# EAGLE board board 100% avec isolation Groupe 4 (EAGLE 8.3.1)
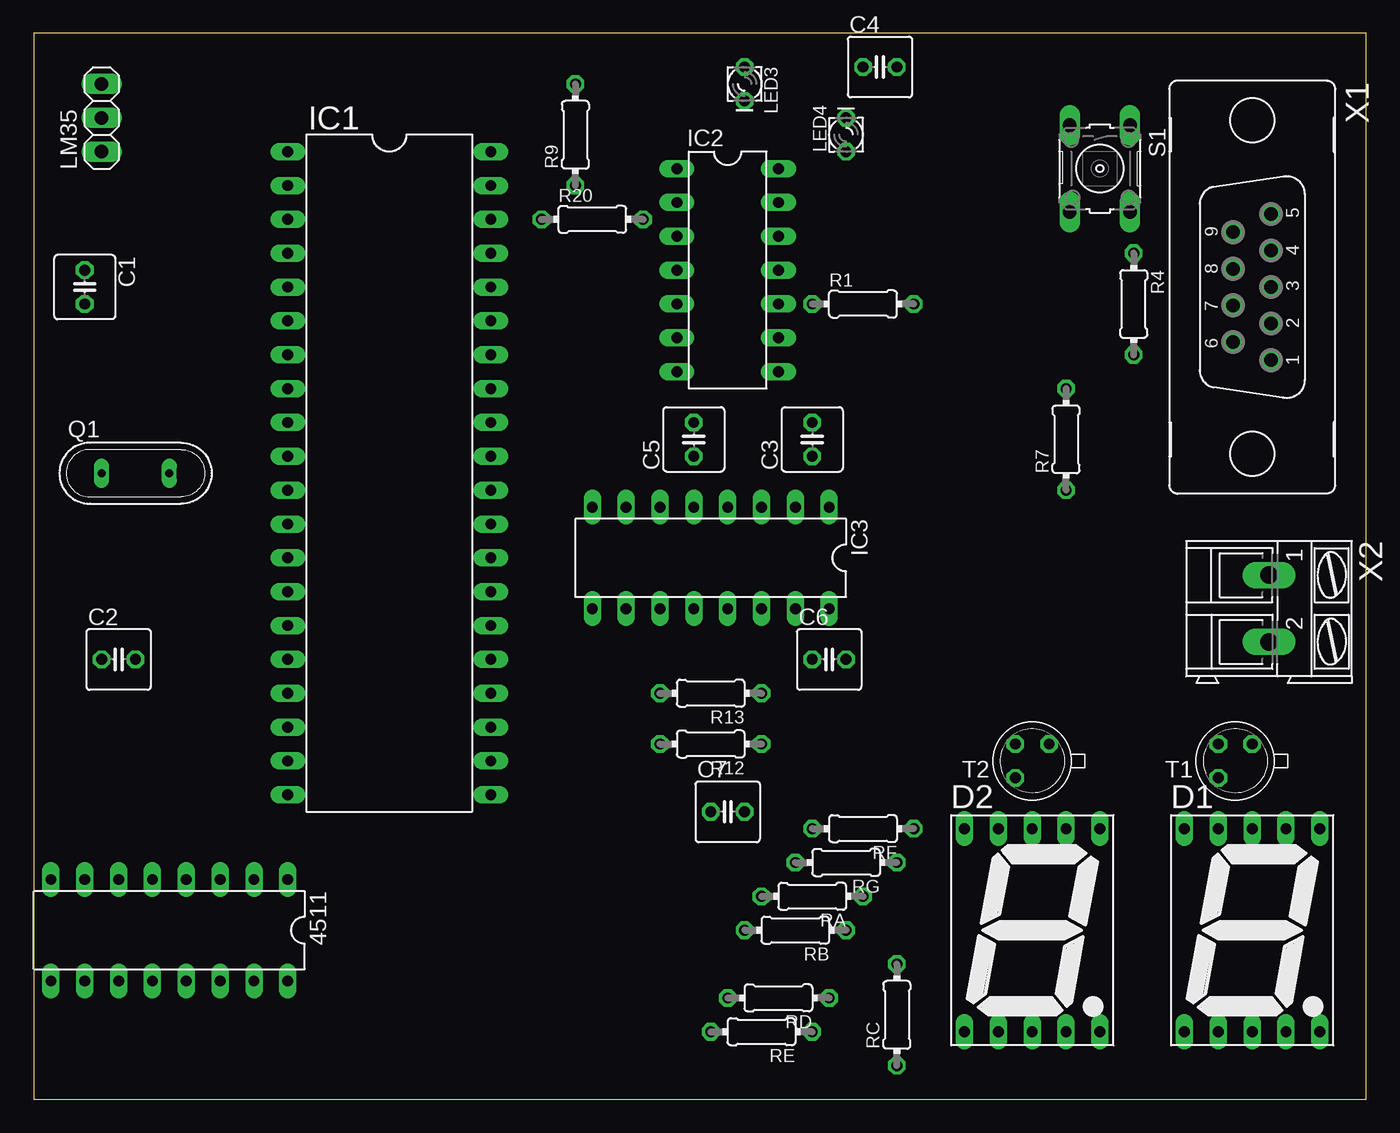
[diagram p0: board, top side]
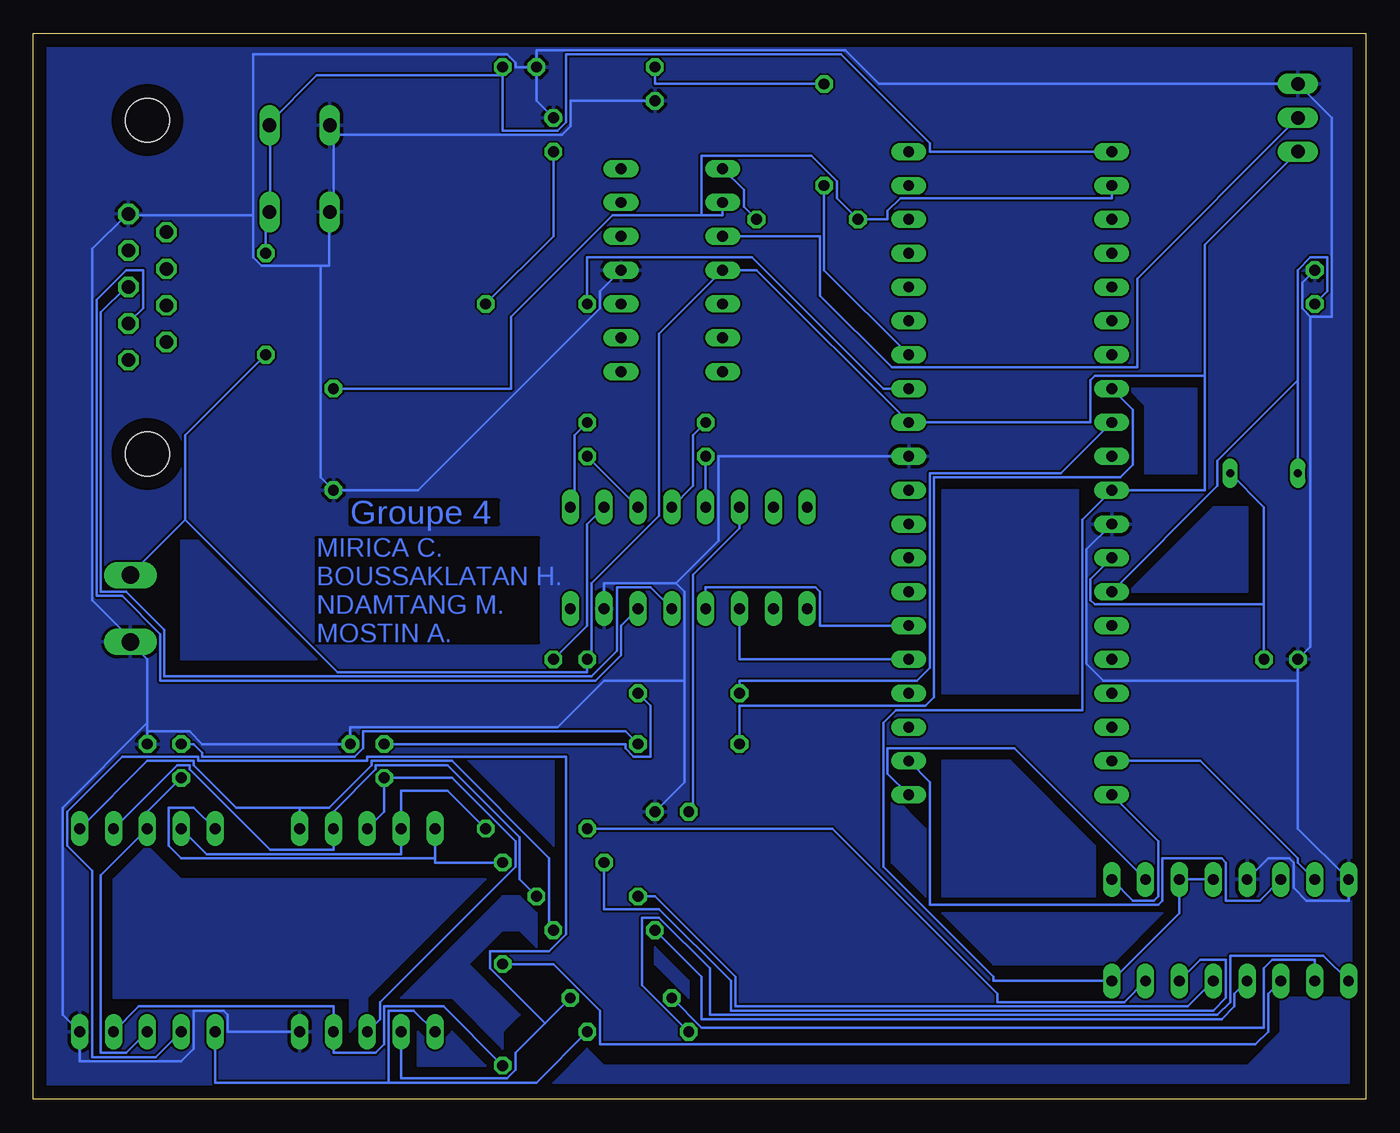
[diagram p1: board, bottom side, seen from below]

Size 100 x 80 mm. Coordinates in mm from the lower left corner, seen from the top.
Outline: 0,0 100,0 100,80 0,80 0,0
Copper layers (1*16): Top 0.035mm / dielectric 1.5mm / Bottom 0.035mm
Design rules "default": minimum track width 6mil, minimum drill 0.35mm, track to track 6mil, track to pad 6mil, pad to pad 6mil, via to via 6mil, smd to smd 6mil, copper to edge 40mil, drill to drill 6mil, minimum pad ring 10mil, minimum via ring 8mil, stop-mask expansion 4mil, vias tented up to drill 0mil, thermal gap 10mil

## Footprints (pad centres in the part's own frame; a part is rotated, then mirrored left to right if it is on the bottom)
DIL16 = drill 0.813 long: 1 -8.89,-3.81; 2 -6.35,-3.81; 3 -3.81,-3.81; 4 -1.27,-3.81; 5 1.27,-3.81; 6 3.81,-3.81; 7 6.35,-3.81; 8 8.89,-3.81; 9 8.89,3.81; 10 6.35,3.81; 11 3.81,3.81; 12 1.27,3.81; 13 -1.27,3.81; 14 -3.81,3.81; 15 -6.35,3.81; 16 -8.89,3.81
C025-050X050 = drill 0.813 octagon: 1 -1.27,0; 2 1.27,0
7SEG-13 = drill 0.813 long: 1 -5.08,-7.62; 2 -2.54,-7.62; 3 0,-7.62; 4 2.54,-7.62; 5 5.08,-7.62; 6 5.08,7.62; 7 2.54,7.62; 8 0,7.62; 9 -2.54,7.62; 10 -5.08,7.62
DIL40 = drill 0.813 long: 1 -24.13,-7.62; 2 -21.59,-7.62; 3 -19.05,-7.62; 4 -16.51,-7.62; 5 -13.97,-7.62; 6 -11.43,-7.62; 7 -8.89,-7.62; 8 -6.35,-7.62; 9 -3.81,-7.62; 10 -1.27,-7.62; 11 1.27,-7.62; 12 3.81,-7.62; 13 6.35,-7.62; 14 8.89,-7.62; 15 11.43,-7.62; 16 13.97,-7.62; 17 16.51,-7.62; 18 19.05,-7.62; 19 21.59,-7.62; 20 24.13,-7.62; 21 24.13,7.62; 22 21.59,7.62; 23 19.05,7.62; 24 16.51,7.62; 25 13.97,7.62; 26 11.43,7.62; 27 8.89,7.62; 28 6.35,7.62; 29 3.81,7.62; 30 1.27,7.62; 31 -1.27,7.62; 32 -3.81,7.62; 33 -6.35,7.62; 34 -8.89,7.62; 35 -11.43,7.62; 36 -13.97,7.62; 37 -16.51,7.62; 38 -19.05,7.62; 39 -21.59,7.62; 40 -24.13,7.62
DIL14 = drill 0.813 long: 1 -7.62,-3.81; 2 -5.08,-3.81; 3 -2.54,-3.81; 4 0,-3.81; 5 2.54,-3.81; 6 5.08,-3.81; 7 7.62,-3.81; 8 7.62,3.81; 9 5.08,3.81; 10 2.54,3.81; 11 0,3.81; 12 -2.54,3.81; 13 -5.08,3.81; 14 -7.62,3.81
LED_LD260 = drill 0.813 octagon: A -1.27,0; K 1.27,0
1X03 = drill 1.016 long: 1 -2.54,0; 2 0,0; 3 2.54,0
QS = drill 0.61 long: 1 -2.54,0; 2 2.54,0
0204/7 = drill 0.813 octagon: 1 -3.81,0; 2 3.81,0
B3F-10XX = drill 1.016 long: 1 -3.251,2.261; 2 3.251,2.261; 3 -3.251,-2.261; 4 3.251,-2.261
TO18 = drill 0.813 octagon: 1 -1.27,-1.27; 2 1.27,-1.27; 3 1.27,1.27
F09V = drill 1.016 octagon: 1 5.486,1.422; 2 2.743,1.422; 3 0,1.422; 4 -2.743,1.422; 5 -5.486,1.422; 6 4.115,-1.422; 7 1.372,-1.422; 8 -1.372,-1.422; 9 -4.115,-1.422 | hole 3.302: -12.522,0; 12.522,0
AK300/2 = drill 1.321 long: 1 -2.515,0; 2 2.489,0

## Placement (x,y rotation side)
4511  [DIL16]  10.16,12.7 180 top
C1  [C025-050X050]  3.81,60.96 270 top
C2  [C025-050X050]  6.35,33.02 0 top
C3  [C025-050X050]  58.42,49.53 90 top
C4  [C025-050X050]  63.5,77.47 0 top
C5  [C025-050X050]  49.53,49.53 90 top
C6  [C025-050X050]  59.69,33.02 0 top
C7  [C025-050X050]  52.07,21.59 0 top
D1  [7SEG-13]  91.44,12.7 0 top
D2  [7SEG-13]  74.93,12.7 0 top
IC1  PIC16F877P  [DIL40]  26.67,46.99 270 top
IC2  [DIL14]  52.07,62.23 270 top
IC3  MAX232  [DIL16]  50.8,40.64 180 top
LED3  [LED_LD260]  53.34,76.2 270 top
LED4  [LED_LD260]  60.96,72.39 90 top
LM35  [1X03]  5.08,73.66 90 top
Q1  [QS]  7.62,46.99 0 top
R1  [0204/7]  62.23,59.69 0 top
R4  [0204/7]  82.55,59.69 270 top
R7  [0204/7]  77.47,49.53 90 top
R9  [0204/7]  40.64,72.39 90 top
R12  [0204/7]  50.8,26.67 180 top
R13  [0204/7]  50.8,30.48 180 top
R20  [0204/7]  41.91,66.04 0 top
RA  [0204/7]  58.42,15.24 180 top
RB  [0204/7]  57.15,12.7 180 top
RC  [0204/7]  64.77,6.35 90 top
RD  [0204/7]  55.88,7.62 180 top
RE  [0204/7]  54.61,5.08 180 top
RF  [0204/7]  62.23,20.32 180 top
RG  [0204/7]  60.96,17.78 180 top
S1  [B3F-10XX]  80.01,69.85 270 top
T1  2N2222  [TO18]  90.17,25.4 180 top
T2  2N2222  [TO18]  74.93,25.4 180 top
X1  [F09V]  91.44,60.96 270 top
X2  [AK300/2]  92.71,36.83 270 top

## Library data of the parts
4511 IC2 = ic-package
C1-C7 R1 R4 R7 R9 R12 R13 R20 RA RB RC RD RE RF RG = rcl
D1 D2 Q1 = special
IC1 = microchip; MF: MICROCHIP; MPN: PIC16F877-04/P; OC_FARNELL: 9761349; OC_NEWARK: 61K3463
IC3 = maxim; MF: MAXIM; MPN: MAX232ACPE+; OC_FARNELL: 9723773; OC_NEWARK: 68K4544
LED3 LED4 = eagle-ltspice; SPICEMODEL: NONE; SPICEPREFIX: D; SPICETYPE: diode
LM35 = pinhead
S1 = switch-omron; MPN: B3F-1000; OC_FARNELL: 176432; OC_NEWARK: 36M3542
T1 T2 = transistor
X1 = con-subd; OC_FARNELL: unknown; OC_NEWARK: unknown
X2 = con-ptr500; OC_FARNELL: unknown; OC_NEWARK: unknown

## Nets
GND: 4511.5 4511.8 C1.1 C2.1 C4.1 C7.2 D1.5 D2.5 IC1.12 IC1.31 IC2.11 IC3.15 LED3.K LED4.K LM35.3 R7.1 S1.3 S1.4 T1.1 T2.1 X1.5 X2.2
N$1: IC1.9 R13.2
N$2: C1.2 IC1.14 Q1.1
N$3: C3.2 IC3.1
N$4: IC1.2 IC2.2 R7.2 R20.1
N$5: IC2.3 LM35.2
N$6: LED4.A R1.2
N$7: C4.2 IC1.1 R4.1 S1.1 S1.2
N$8: C2.2 IC1.13 Q1.2
N$9: 4511.1 IC1.20
N$10: LED3.A R9.2
N$11: IC1.34 R9.1
N$12: IC1.33 R1.1
N$13: IC2.1 R20.2
N$14: 4511.2 IC1.21
N$15: IC3.14 X1.2
N$16: IC3.13 X1.3
N$17: C3.1 IC3.3
N$18: C5.1 IC3.5
N$19: C5.2 IC3.4
N$20: C7.1 IC3.6
N$21: C6.2 IC3.2
N$23: IC1.25 IC3.11
N$24: IC1.26 IC3.12
N$26: 4511.7 IC1.19
N$27: D1.3 D1.8 T1.3
N$29: 4511.6 IC1.22
N$30: 4511.13 RA.2
N$31: IC1.8 R12.2
N$32: 4511.12 RB.2
N$33: 4511.11 RC.2
N$34: 4511.10 RD.2
N$35: 4511.9 RE.2
N$36: D1.7 D2.7 RA.1
N$37: D1.2 D2.2 RD.1
N$38: D1.4 D2.4 RC.1
N$39: D1.1 D2.1 RE.1
N$41: 4511.15 RF.2
N$42: 4511.14 RG.2
N$44: D1.10 D2.10 RG.1
N$45: R12.1 T1.2
N$46: 4511.3 4511.4 4511.16 C6.1 IC1.11 IC1.32 IC2.4 LM35.1 R4.2 X2.1
N$47: D2.3 D2.8 T2.3
N$48: R13.1 T2.2
N$51: D1.6 D2.6 RB.1
N$53: D1.9 D2.9 RF.1
VCC: IC3.16

## Tracks (layer width: path | path; a pad name or v marks a point on that pad's centre or on a via)
GND
  Bottom 0.178: C1.1 4.76,61.28 4.76,59.37 4.13,58.74 | 4.13,58.74 2.54,58.74 2.54,73.66 LM35.3 36.51,76.2 39.05,78.74 62.23,78.74 C4.1 | 5.08,31.43 C2.1 4.13,33.97 4.13,58.74 | 5.08,31.43 5.08,20.32 4511.8 1.27,14.92 4.45,14.92 5.4,15.88 5.4,17.78 5.71,18.1 7.3,18.1 4511.5 | IC1.12 20.95,41.27 20.95,32.7 19.68,31.43 5.08,31.43 | IC2.11 57.47,60.64 57.47,59.37 71.12,45.72 R7.1 78.42,46.67 78.42,62.55 | LED4.K 62.23,74.93 C4.1 | LED3.K 59.69,74.93 59.69,73.03 60.33,72.39 77.47,72.39 | 77.47,72.39 77.47,73.03 S1.3 77.47,72.39 | 77.47,72.39 77.47,66.67 S1.4 77.79,66.36 77.79,62.55 78.42,62.55 | 83.5,66.36 92.71,66.36 X1.5 93.03,66.36 95.57,63.82 95.57,37.47 92.71,34.61 X2.2 92.71,34.29 91.44,33.02 91.44,28.26 | 83.5,66.36 83.5,63.18 82.87,62.55 78.42,62.55 | C4.1 63.82,77.47 63.82,77.79 64.45,78.42 83.5,78.42 83.5,66.36 | C7.2 51.12,23.81 51.12,31.43 | 51.12,31.43 51.12,38.1 51.75,38.73 | 51.75,38.73 57.15,38.73 IC3.15 | IC1.31 48.58,48.26 48.58,41.91 51.75,38.73 | D2.5 85.41,5.08 85.41,6.35 85.72,6.67 87.95,6.67 87.95,3.81 88.9,2.86 96.52,2.86 D1.5 97.79,6.35 97.79,21.91 91.44,28.26 | 91.44,27.62 88.27,27.62 87.31,26.67 T2.1 76.2,27.94 60.64,27.94 57.15,31.43 51.12,31.43 | T1.1 91.44,27.62 | 91.44,27.62 91.44,28.26
  pour Bottom (isolate 0.02): 0,80.01 100.33,80.01 100.33,0 0,0
N$1
  Bottom 0.178: IC1.9 22.86,46.99 32.7,46.99 32.7,32.38 33.66,31.43 46.99,31.43 R13.2
N$2
  Bottom 0.178: 5.08,53.98 5.08,62.23 4.13,63.18 2.86,63.18 2.86,60.64 C1.2 | 5.08,53.98 Q1.1 | IC1.14 11.11,46.04 11.11,47.94 5.08,53.98
N$3
  Bottom 0.178: IC3.1 59.37,44.77 59.37,49.85 C3.2
N$4
  Bottom 0.178: IC1.2 19.05,67.63 34.92,67.63 35.88,66.67 35.88,66.04 R20.1 39.69,67.63 39.69,68.9 41.59,70.8 49.85,70.8 49.85,66.36 | R7.2 64.14,53.34 64.14,58.74 56.52,66.36 49.85,66.36 | 49.85,66.36 48.26,66.36 IC2.2
N$5
  Bottom 0.178: IC2.3 40.96,64.77 40.96,60.33 35.56,54.93 17.14,54.93 17.14,61.59 LM35.2
N$6
  Bottom 0.178: R1.2 60.96,64.77 LED4.A
N$7
  Bottom 0.178: R4.1 82.55,66.36 S1.2 82.23,66.67 82.23,73.03 S1.1 82.23,73.34 78.74,76.83 64.77,76.83 | IC1.1 32.7,71.12 32.7,71.75 39.37,78.42 60.01,78.42 60.01,73.34 60.64,72.71 64.77,72.71 64.77,76.83 | 64.77,76.83 C4.2
N$8
  Bottom 0.178: Q1.2 7.62,44.45 7.62,37.15 | C2.2 7.62,37.15 | IC1.13 20.64,39.05 20.64,37.47 20.32,37.15 7.62,37.15
N$9
  Bottom 0.178: 4511.1 17.46,14.92 15.88,14.92 15.56,15.24 15.56,19.37 IC1.20
N$10
  Bottom 0.178: R9.2 53.34,76.2 LED3.A
N$11
  Bottom 0.178: IC1.34 40.64,62.23 R9.1
N$12
  Bottom 0.178: IC1.33 36.2,53.34 46.04,63.18 58.42,63.18 R1.1
N$13
  Bottom 0.178: R20.2 46.67,66.99 46.67,68.26 IC2.1
N$14
  Bottom 0.178: 4511.2 26.35,26.35 35.88,26.35 35.88,24.45 IC1.21
N$15
  Bottom 0.178: IC3.14 55.88,35.56 55.88,33.34 57.78,31.43 90.49,31.43 90.49,34.92 93.34,37.78 95.25,37.78 95.25,60.01 93.03,62.23 91.76,62.23 91.76,59.37 92.71,58.42 X1.2
N$16
  Bottom 0.178: IC3.13 53.66,38.42 56.2,38.42 56.2,33.66 58.1,31.75 90.17,31.75 90.17,35.24 93.03,38.1 94.93,38.1 94.93,59.05 93.03,60.96 X1.3
N$17
  Bottom 0.178: C3.1 IC3.3
N$18
  Bottom 0.178: C5.1 IC3.5
N$19
  Bottom 0.178: IC3.4 50.48,46.04 50.48,49.85 C5.2
N$20
  Bottom 0.178: C7.1 50.48,21.91 50.48,39.37 46.99,42.86 IC3.6
N$21
  Bottom 0.178: C6.2 58.42,35.56 58.42,43.18 IC3.2
N$23
  Bottom 0.178: IC1.25 46.99,33.02 IC3.11
N$24
  Bottom 0.178: IC1.26 40.96,35.56 40.96,38.1 41.27,38.42 49.53,38.42 IC3.12
N$26
  Bottom 0.178: 4511.7 5.08,17.78 5.08,18.1 12.38,25.4 IC1.19
N$27
  Bottom 0.178: T1.3 91.44,21.59 D1.8 94.93,16.83 94.93,3.49 93.03,3.49 D1.3
N$29
  Bottom 0.178: 4511.6 7.94,14.92 10.48,14.92 10.48,17.78 10.79,18.1 15.24,18.1 15.24,14.92 15.56,14.61 32.7,14.61 32.7,23.81 IC1.22
N$30
  Bottom 0.178: 4511.13 13.34,6.99 47.31,6.99 47.31,9.21 53.34,15.24 RA.2
N$31
  Bottom 0.178: IC1.8 17.46,51.75 17.46,47.62 18.41,46.67 32.38,46.67 32.38,30.16 33.02,29.53 46.99,29.53 R12.2
N$32
  Bottom 0.178: 4511.12 9.84,7.94 9.84,6.99 10.79,6.03 49.85,6.03 49.85,9.21 RB.2
N$33
  Bottom 0.178: 4511.11 7.3,7.94 7.3,5.08 8.26,4.13 57.47,4.13 57.47,6.67 60.96,10.16 RC.2
N$34
  Bottom 0.178: RD.2 49.85,5.4 7.62,5.4 7.62,9.84 6.99,10.48 3.81,10.48 4511.10
N$35
  Bottom 0.178: 4511.9 3.17,10.79 10.16,10.79 10.16,7.3 11.11,6.35 49.21,6.35 49.21,9.84 53.02,13.65 54.29,13.65 54.29,8.57 RE.2
N$36
  Bottom 0.178: RA.1 63.5,16.51 63.5,19.68 68.9,25.08 74.3,25.08 74.3,24.77 77.47,21.59 D2.7 77.47,18.73 82.23,18.73 88.27,24.77 88.27,25.08 89.22,25.08 D1.7
N$37
  Bottom 0.178: 61.59,5.71 63.82,3.49 63.82,2.22 64.45,1.59 72.39,1.59 D2.2 | 61.59,5.71 RD.1 | D1.2 90.81,3.17 95.57,3.17 95.57,17.14 97.47,19.05 97.47,21.59 93.34,25.72 87.63,25.72 87.63,25.4 74.93,25.4 74.93,25.72 60.01,25.72 60.01,12.38 61.28,11.11 65.72,11.11 65.72,9.84 61.59,5.71
N$38
  Bottom 0.178: RC.1 69.22,6.99 73.66,6.99 73.66,4.13 74.3,3.49 77.47,3.49 D2.4 77.47,6.99 92.08,6.99 D1.4
N$39
  Bottom 0.178: RE.1 62.23,1.27 73.34,1.27 | 73.34,1.27 86.36,1.27 D1.1 | D2.1 71.44,6.67 73.34,6.67 73.34,1.27
N$41
  Bottom 0.178: 4511.15 18.1,7.3 27.62,7.3 27.62,7.94 40.01,20.32 RF.2
N$42
  Bottom 0.178: 4511.14 12.38,10.48 10.48,10.48 10.48,7.62 11.43,6.67 47.62,6.67 47.62,8.89 53.02,14.29 57.15,14.29 RG.2
N$44
  Bottom 0.178: RG.1 69.85,17.78 69.85,18.1 | D2.10 69.85,18.1 | D1.10 87.95,21.91 89.85,21.91 89.85,19.05 88.9,18.1 69.85,18.1
N$45
  Bottom 0.178: R12.1 55.56,27.62 75.25,27.62 75.25,26.35 75.88,25.72 87.31,25.72 87.31,26.04 87.95,26.67 T1.2
N$46
  Bottom 0.178: R4.2 88.58,49.85 88.58,43.5 | 88.58,43.5 92.71,39.37 X2.1 | 88.58,43.5 77.15,32.07 58.42,32.07 C6.1 58.1,33.34 58.1,38.73 53.02,43.81 53.02,57.47 IC2.4 45.72,62.23 IC1.32 20.64,50.8 20.64,53.98 20.32,54.29 12.06,54.29 | 4511.4 4511.3 13.97,13.97 4511.16 27.94,8.89 27.94,9.21 36.2,17.46 36.2,28.26 35.24,29.21 21.27,29.21 21.27,43.5 IC1.11 12.06,45.72 12.06,54.29 | 12.06,54.29 12.06,64.14 LM35.1
N$47
  Bottom 0.178: D2.3 73.98,6.03 73.98,7.3 63.82,17.46 63.82,19.37 68.58,24.13 T2.3 73.66,21.59 D2.8
N$48
  Bottom 0.178: T2.2 55.56,26.67 55.56,26.35 54.93,25.72 53.66,25.72 53.66,29.53 R13.1
N$51
  Bottom 0.178: RB.1 61.28,13.02 61.28,18.1 68.58,25.4 74.61,25.4 74.61,25.08 77.79,21.91 80.01,21.91 | D2.6 80.01,21.91 | D1.6 91.44,25.4 87.95,25.4 87.95,25.08 84.77,21.91 80.01,21.91
N$53
  Bottom 0.178: RF.1 68.9,23.18 72.39,23.18 D2.9 72.39,18.41 87,18.41 D1.9
S$1
  pour Bottom: 8.89,38.1 8.89,44.45 11.43,44.45 17.78,38.1
S$2
  pour Bottom: 12.7,53.34 17.78,53.34 16.51,52.07 16.51,46.99
S$3
  pour Bottom: 12.7,53.34 12.7,46.99 16.51,46.99 16.51,52.07 13.97,52.07
S$4
  pour Bottom: 15.24,13.97 31.75,13.97 27.94,10.16 19.05,10.16
S$5
  pour Bottom: 26.67,25.4 31.75,25.4 31.75,15.24 20.32,15.24 20.32,19.05
S$6
  pour Bottom: 35.56,21.59 35.56,17.78 33.02,15.24 33.02,20.32 35.56,22.86
S$7
  pour Bottom: 12.7,54.61 16.51,54.61 16.51,60.96 12.7,64.77
S$8
  pour Bottom: 21.59,30.48 31.75,30.48 31.75,45.72 21.59,45.72
S$9
  pour Bottom: 67.31,16.51 88.9,16.51 90.17,17.78 91.44,19.05 93.98,16.51 93.98,7.62 76.2,7.62 76.2,5.08 74.93,6.35 74.93,7.62 66.04,16.51
S$10
  pour Bottom: 68.58,5.08 66.04,2.54 71.12,2.54 71.12,5.08 69.85,3.81
S$11
  pour Bottom: 63.5,15.24 64.77,15.24 72.39,7.62 68.58,7.62 64.77,3.81 64.77,5.08 63.5,6.35 67.31,10.16 64.77,12.7 63.5,12.7 62.23,11.43 62.23,13.97
S$12
  pour Bottom: 58.42,3.81 60.96,1.27 1.27,1.27 1.27,7.62 6.35,7.62 6.35,5.08 8.89,2.54 57.15,2.54
S$13
  pour Bottom: 50.8,7.62 53.34,10.16 53.34,11.43 50.8,8.89
S$14
  pour Bottom: 60.96,19.05 67.31,25.4 60.96,25.4
S$15
  pour Bottom: 78.74,33.02 87.63,41.91 88.9,41.91 88.9,33.02

## Text on the board
Bottom: Groupe 4 | MIRICA C. / BOUSSAKLATAN H. / NDAMTANG M. / MOSTIN A.